# Altium PCB PCB2.PcbDoc (part 3 of 3)
Units mil, origin at the board's own origin, x right, y up, seen from the top; angles counter-clockwise.
Board outline 2598.43 x 2874.02 mil, 2 copper layers (Top Layer, Bottom Layer); 202 components, 116 nets, 598 pads, 319 vias.
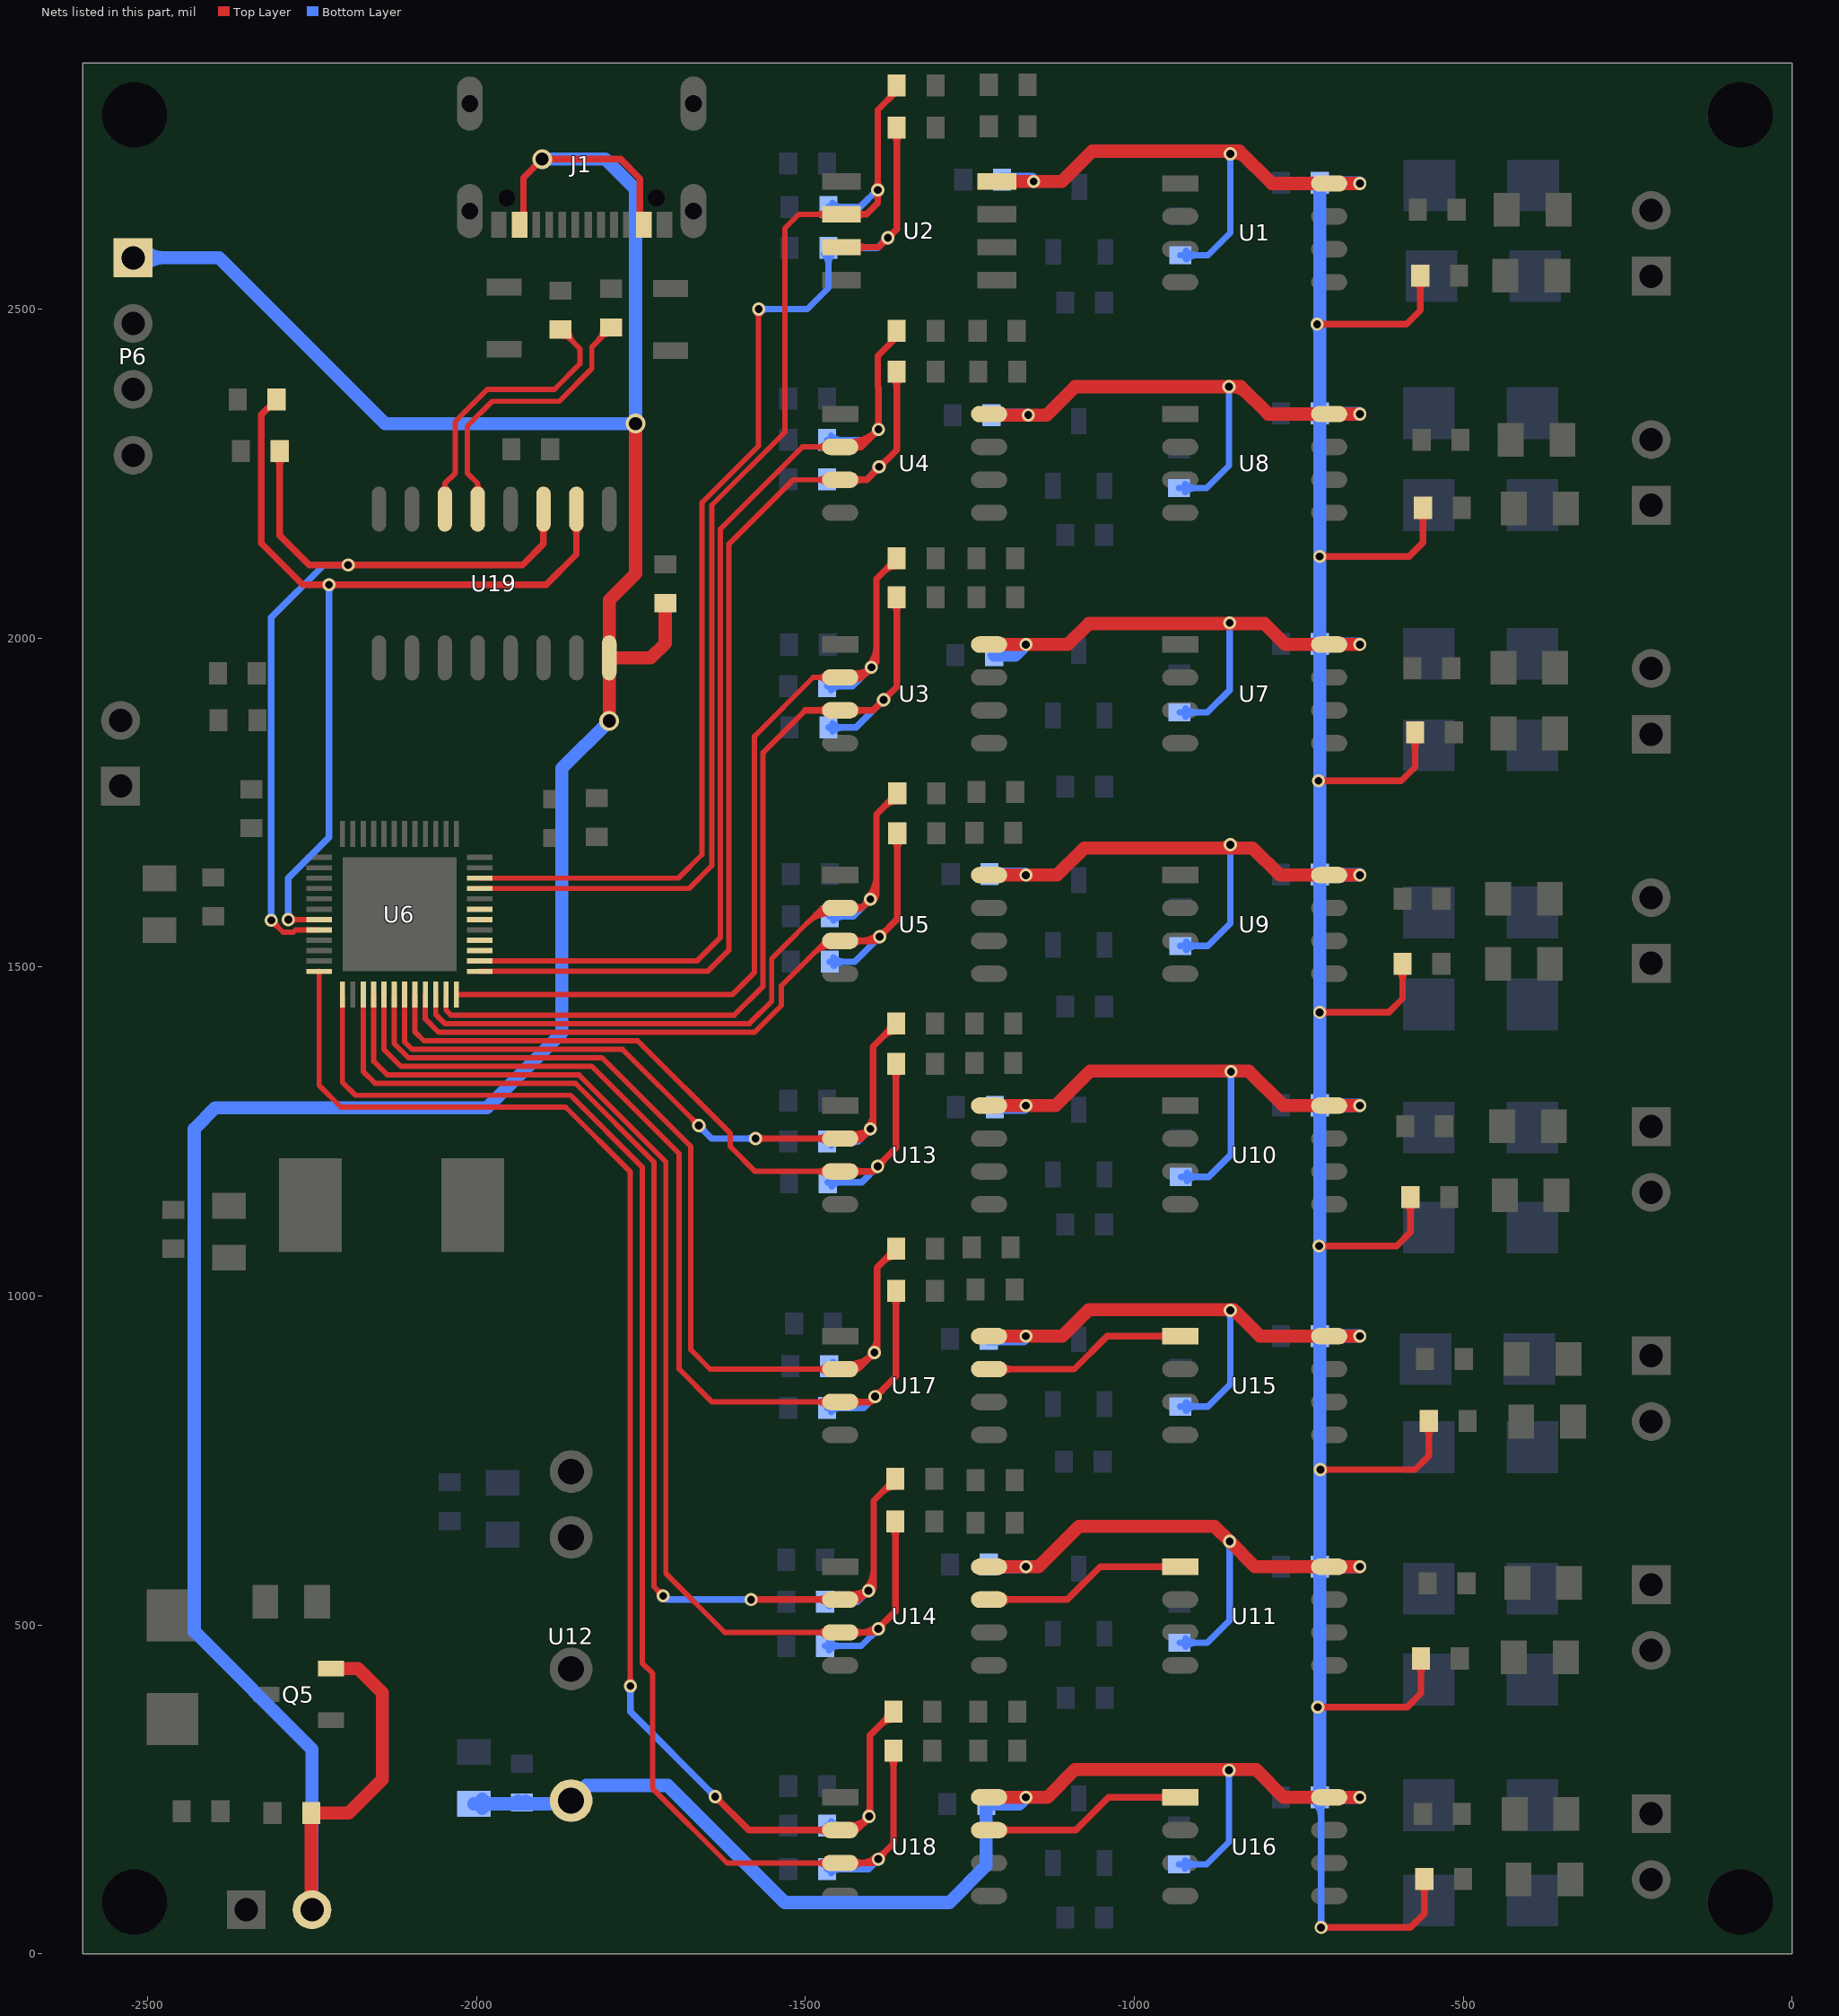
[diagram p3: the nets of this part, all layers, seen from the top]

## Via types
v1: diameter 20, hole 12, Top Layer to Bottom Layer, tented both sides, 315 vias
v2: diameter 30, hole 20, Top Layer to Bottom Layer, tented both sides, 4 vias

## Nets (pads, with @x,y where several pads share a name; then routed paths per layer and width w, separated by ;. In a path a pad name is that pad's centre, name@x,y a point inside that pad or via, vN(x,y) a via of type N, cw(c..) or ccw(c..) an arc to the next point about the centre after c; other vN are vias at no path point) (continued)
NetU11_1: U11.1 U14.7 | length 368.2
  Top Layer w10: U14.7@-1220.62,538.43 -1101.57,538.43 -1051.57,588.43 U11.1@-930,588.43 ; U14.7@-1200.32,533.13 cw(c-1187.52,520.32) -1187.52,538.43 cw(c-1187.52,556.54) U14.7@-1200.32,543.73 ; U11.1@-950.3,583.13 ccw(c-963.11,570.32) -963.11,588.43 ccw(c-963.11,606.54) U11.1@-950.3,593.73
NetU15_1: U15.1 U17.7 | length 368.2
  Top Layer w10: U17.7@-1220.62,888.86 -1091.14,888.86 -1041.14,938.86 U15.1@-930,938.86 ; U17.7@-1200.32,883.55 cw(c-1187.52,870.75) -1187.52,888.86 cw(c-1187.52,906.96) U17.7@-1200.32,894.16 ; U15.1@-950.3,933.55 ccw(c-963.11,920.75) -963.11,938.86 ccw(c-963.11,956.96) U15.1@-950.3,944.16
NetU16_1: U16.1 U18.7 | length 368.2
  Top Layer w10: U18.7@-1220.62,188 -1089,188 -1039,238 U16.1@-930,238 ; U18.7@-1200.32,182.7 cw(c-1187.52,169.89) -1187.52,188 cw(c-1187.52,206.11) U18.7@-1200.32,193.3 ; U16.1@-950.3,232.7 ccw(c-963.11,219.89) -963.11,238 ccw(c-963.11,256.11) U16.1@-950.3,243.3
RXD0: R35.1 U6.19 U19.2 | length 1524
  Top Layer w8: v1@-2285.86,1572.14 U6.19@-2239.05,1572.14 ; v1@-2281.76,1567.76 cw(c-2271.16,1557.16) -2271.16,1572.14 ; v1@-2281.76,1576.24 ccw(c-2271.86,1586.14) -2271.86,1572.14
  Top Layer w10: R35.1@-2304,2362.35 -2327,2339.35 -2327,2144 -2264,2081 v1(-2224,2081) -1894,2081 -1848,2127 U19.2@-1848,2196.09 ; v1@-2227.54,2077.46 ccw(c-2236.07,2068.93) -2236.07,2081 ccw(c-2236.07,2093.07) v1@-2227.54,2084.54 ; v1@-2220.46,2077.46 cw(c-2211.93,2068.93) -2211.93,2081 cw(c-2211.93,2093.07) v1@-2220.46,2084.54 ; U19.2@-1852.26,2168.5 cw(c-1862.54,2158.22) -1848,2158.22 cw(c-1833.46,2158.22) U19.2@-1843.74,2168.5
  Bottom Layer w10: v1@-2289.54,1575.54 ccw(c-2298.07,1584.07) -2286,1584.07 ccw(c-2273.93,1584.07) v1@-2282.46,1575.54 ; v1(-2286,1572) -2286,1635 -2224,1697 v1(-2224,2081) ; v1@-2227.54,2077.46 cw(c-2236.07,2068.93) -2224,2068.93 cw(c-2211.93,2068.93) v1@-2220.46,2077.46
RXD1: LED9.2 R2.2 U2.2 U6.45 | length 1967.2
  Top Layer w8: U6.45@-1994.95,1619.38 -1676.62,1619.38 -1642,1654 -1642,2202 -1531,2313 -1531,2623 -1509.83,2644.17 U2.2@-1444.97,2644.17 ; U2.2@-1468.01,2638.16 ccw(c-1482.52,2623.64) -1482.52,2644.17 ccw(c-1482.52,2664.69) U2.2@-1468.01,2650.18
  Top Layer w10: U2.2@-1444.97,2644.17 -1406.83,2644.17 -1389.83,2661.17 v1(-1389.83,2681) -1389.83,2802.78 -1361.06,2831.56 LED9.2@-1361.06,2840 ; U2.2@-1422.64,2638.86 cw(c-1409.84,2626.06) -1409.84,2644.17 cw(c-1409.84,2662.27) U2.2@-1422.64,2649.47 ; v1@-1393.37,2677.46 cw(c-1401.91,2668.93) -1389.83,2668.93 cw(c-1377.76,2668.93) v1@-1386.3,2677.46 ; v1@-1393.37,2684.54 ccw(c-1401.91,2693.07) -1389.83,2693.07 ccw(c-1377.76,2693.07) v1@-1386.3,2684.54
  Bottom Layer w10: R2.2@-1464.94,2655 -1416.83,2655 v1@-1389.83,2682 ; R2.2@-1458.74,2648.79 cw(c-1443.75,2633.8) -1443.75,2655 cw(c-1443.75,2676.2) R2.2@-1458.74,2661.21 ; -1400.08,2671.76 cw(c-1389.83,2661.51) v1@-1389.83,2676 ; -1397.66,2674.17 ccw(c-1404.49,2681) v1@-1394.83,2681
RXD2: LED1.2 R10.2 U4.2 U6.38 | length 1770.9
  Top Layer w8: U6.38@-1994.95,1509.14 -1664.85,1509.14 -1629,1545 -1629,2166 -1504.43,2290.57 U4.2@-1447,2290.57 ; U4.2@-1468.01,2284.56 ccw(c-1482.52,2270.05) -1482.52,2290.57 ccw(c-1482.52,2311.09) U4.2@-1468.01,2296.58
  Top Layer w10: U4.2@-1447,2290.57 -1415.43,2290.57 ; U4.2@-1432,2288.07 ccw(c-1432,2322.04) -1407.98,2298.02 ; U4.2@-1432,2298.07 ccw(c-1432,2356.18) v1@-1390.91,2315.09 ; U4.2@-1426.37,2285.62 cw(c-1415.43,2276.02) -1415.43,2290.57 ; U4.2@-1426.37,2295.52 ccw(c-1415.43,2305.13) -1415.43,2290.57 ; v1@-1393.89,2317.11 cw(c-1405.96,2317.11) -1397.43,2308.57 cw(c-1388.89,2300.04) v1@-1388.89,2312.11 ; v1@-1392.43,2320.65 ccw(c-1400.96,2329.18) -1388.89,2329.18 ccw(c-1376.82,2329.18) v1@-1385.35,2320.65 ; LED1.2@-1361.06,2467 -1361.06,2457.67 -1389.83,2428.89 -1389.83,2382.05 -1388.89,2381.11 v1(-1388.89,2317.11) -1415.43,2290.57
  Bottom Layer w10: R10.2@-1466.94,2301 -1405,2301 v1(-1388.89,2317.11) ; R10.2@-1460.74,2294.79 cw(c-1445.75,2279.8) -1445.75,2301 cw(c-1445.75,2322.2) R10.2@-1460.74,2307.21 ; v1@-1393.89,2317.11 cw(c-1405.96,2317.11) -1397.43,2308.57 cw(c-1388.89,2300.04) v1@-1388.89,2312.11
RXD3: LED3.2 R3.2 U3.2 U6.36 | length 1553.5
  Top Layer w8: U6.36@-2030.39,1457.95 -1611.05,1457.95 -1577.18,1491.82 -1577.18,1850.97 -1488,1940.14 U3.2@-1447,1940.14 ; U3.2@-1468.01,1934.13 ccw(c-1482.52,1919.62) -1482.52,1940.14 ccw(c-1482.52,1960.66) U3.2@-1468.01,1946.15
  Top Layer w10: U3.2@-1447,1940.14 -1414.86,1940.14 ; U3.2@-1432.66,1937.73 ccw(c-1426.96,1958.51) -1411.73,1943.27 ; U3.2@-1430.02,1947.38 ccw(c-1421.72,1977.59) v1(-1399.56,1955.44) ; U3.2@-1426.49,1935.05 cw(c-1414.86,1924.3) -1414.86,1940.14 ; U3.2@-1426.49,1945.23 ccw(c-1414.86,1955.98) -1414.86,1940.14 ; v1@-1404.56,1955.44 cw(c-1416.63,1955.44) -1408.1,1946.9 cw(c-1399.56,1938.37) v1@-1399.56,1950.44 ; v1@-1403.1,1958.97 ccw(c-1429.89,1985.77) -1392,1985.77 ; -1381.08,2100.97 cw(c-1361.06,2080.94) LED3.2@-1361.06,2109.27 ; LED3.2@-1373.95,2108.1 ccw(c-1383.9,2118.05) LED3.2@-1369.83,2118.05 ; LED3.2@-1361.06,2121 -1392,2090.06 -1392,1963 v1(-1399.56,1955.44) ; -1414.86,1940.14 v1(-1399.56,1955.44)
  Bottom Layer w10: R3.2@-1466.94,1927 -1428,1927 v1@-1401.52,1953.48 ; R3.2@-1460.74,1920.79 cw(c-1445.75,1905.8) -1445.75,1927 cw(c-1445.75,1948.2) R3.2@-1460.74,1933.21 ; v1@-1404.56,1955.44 cw(c-1416.63,1955.44) -1408.1,1946.9 cw(c-1399.56,1938.37) v1@-1399.56,1950.44
RXD4: LED6.2 R11.2 U5.2 U6.34 | length 1307.7
  Top Layer w8: U6.34@-2061.89,1457.95 -2061.89,1427.89 -2048,1414 -1585,1414 -1551.18,1447.82 -1551.18,1512.82 -1474.29,1589.71 U5.2@-1447,1589.71 ; -1497.48,1566.52 cw(c-1462,1531.03) U5.2@-1462,1581.21 ; -1483.83,1580.17 cw(c-1462,1558.35) U5.2@-1462,1589.21
  Top Layer w10: U5.2@-1447,1589.71 -1414.29,1589.71 ; U5.2@-1426.61,1584.49 cw(c-1414.29,1572.55) -1414.29,1589.71 ; U5.2@-1426.61,1594.93 ccw(c-1414.29,1606.88) -1414.29,1589.71 ; v1@-1406,1603 cw(c-1418.07,1603) -1409.54,1594.46 cw(c-1401,1585.93) v1@-1401,1598 ; v1@-1404.54,1606.54 ccw(c-1434.8,1636.8) -1392,1636.8 ; v1@-1397.46,1599.46 ccw(c-1410.66,1612.66) -1392,1612.66 ; -1380.08,1743.97 cw(c-1360.06,1723.94) LED6.2@-1360.06,1752.27 ; LED6.2@-1372.95,1751.1 ccw(c-1382.9,1761.05) LED6.2@-1368.83,1761.05 ; LED6.2@-1360.06,1764 -1392,1732.06 -1392,1612 v1(-1401,1603) -1414.29,1589.71
  Bottom Layer w10: R11.2@-1463,1577 -1427,1577 v1(-1401,1603) ; R11.2@-1456.79,1570.79 cw(c-1441.8,1555.8) -1441.8,1577 cw(c-1441.8,1598.2) R11.2@-1456.79,1583.21 ; v1@-1406,1603 cw(c-1418.07,1603) -1409.54,1594.46 cw(c-1401,1585.93) v1@-1401,1598
RXD5: LED11.2 R39.2 U6.31 U13.2 | length 1436.5
  Top Layer w8: U6.31@-2109.12,1457.95 -2109.12,1386.28 -2097.85,1375 -1778,1375 v1(-1662,1259) ; v1@-1668,1259 ccw(c-1682.49,1259) -1672.24,1269.24 ccw(c-1662,1279.49) v1@-1662,1265
  Top Layer w10: v1(-1575.71,1239.29) -1505,1239.29 ; v1@-1572.18,1235.75 cw(c-1563.64,1227.21) -1563.64,1239.29 cw(c-1563.64,1251.36) v1@-1572.18,1242.82 ; -1524.29,1239.29 -1505,1239.29 ; U13.2@-1467.3,1233.98 ccw(c-1480.11,1221.18) -1480.11,1239.29 ccw(c-1480.11,1257.39) U13.2@-1467.3,1244.59 ; U13.2@-1432.47,1236.83 ccw(c-1427.85,1261.12) -1410.36,1243.64 ; U13.2@-1430.6,1246.65 ccw(c-1423.58,1283.57) v1@-1397,1257 ; U13.2@-1426.52,1234.16 cw(c-1414.72,1223.12) -1414.72,1239.29 ; U13.2@-1426.52,1244.41 ccw(c-1414.72,1255.45) -1414.72,1239.29 ; -1410.24,1243.76 ccw(c-1420.49,1254) v1@-1406,1254 ; -1407.83,1246.17 cw(c-1401,1239.34) v1@-1401,1249 ; v1@-1404.54,1257.54 ccw(c-1422.73,1275.73) -1397,1275.73 ; -1382.08,1393.97 cw(c-1362.06,1373.94) LED11.2@-1362.06,1402.27 ; LED11.2@-1374.95,1401.1 ccw(c-1384.9,1411.05) LED11.2@-1370.83,1411.05 ; LED11.2@-1362.06,1414 -1397,1379.06 v1@-1397,1257 ; -1505,1239.29 U13.2@-1447,1239.29 -1414.71,1239.29 ; -1414.71,1239.29 v1@-1397,1257
  Bottom Layer w10: v1@-1662,1254 cw(c-1662,1241.93) -1653.46,1250.46 cw(c-1644.93,1259) v1@-1657,1259 ; v1(-1662,1259) -1642.29,1239.29 v1(-1575.71,1239.29) ; v1@-1579.25,1235.75 ccw(c-1587.79,1227.21) -1587.79,1239.29 ccw(c-1587.79,1251.36) v1@-1579.25,1242.82 ; R39.2@-1466.94,1235 -1420,1235 v1(-1401,1254) ; R39.2@-1460.74,1228.79 cw(c-1445.75,1213.8) -1445.75,1235 cw(c-1445.75,1256.2) R39.2@-1460.74,1241.21 ; v1@-1406,1254 cw(c-1418.07,1254) -1409.54,1245.46 cw(c-1401,1236.93) v1@-1401,1249
RXD6: LED13.2 R47.2 U6.30 U17.2 | length 1661.7
  Top Layer w8: U6.30@-2124.88,1457.95 -2124.88,1383.64 -2103.23,1362 -1809,1362 -1674,1227 -1674,918 -1644.86,888.86 U17.2@-1447,888.86 ; U17.2@-1468.01,882.85 ccw(c-1482.52,868.34) -1482.52,888.86 ccw(c-1482.52,909.38) U17.2@-1468.01,894.87
  Top Layer w10: U17.2@-1447,888.86 -1420.14,888.86 -1390.83,918.17 -1390.83,1043.22 LED13.2@-1362.06,1072 ; U17.2@-1432,886.36 ccw(c-1432,908.95) -1416.03,892.97 ; U17.2@-1432,896.36 ccw(c-1432,943.09) v1@-1398.96,910.04 ; v1@-1400,914 cw(c-1412.07,914) -1403.54,905.46 cw(c-1395,896.93) v1@-1395,909 ; v1@-1398.54,917.54 ccw(c-1417.13,936.13) -1390.83,936.13 ; -1382.08,1051.97 cw(c-1362.06,1031.94) LED13.2@-1362.06,1060.27 ; LED13.2@-1374.95,1059.1 ccw(c-1384.9,1069.05) LED13.2@-1370.83,1069.05
  Bottom Layer w10: R47.2@-1463.94,893 -1416,893 v1(-1395,914) ; R47.2@-1457.74,886.79 cw(c-1442.75,871.8) -1442.75,893 cw(c-1442.75,914.2) R47.2@-1457.74,899.21 ; v1@-1400,914 cw(c-1412.07,914) -1403.54,905.46 cw(c-1395,896.93) v1@-1395,909
RXD7: LED15.2 R40.2 U6.27 U14.2 | length 2166.4
  Top Layer w8: U6.27@-2172.11,1457.95 -2172.11,1341.11 -2154,1323 -1849.54,1323 -1730,1203.46 -1730,558 v1(-1716,544) ; v1@-1722,544 ccw(c-1736.49,544) -1726.24,554.24 ccw(c-1716,564.49) v1@-1716,550
  Top Layer w10: v1(-1582.43,538.43) U14.2@-1447,538.43 -1418.57,538.43 ; v1@-1578.89,534.89 cw(c-1570.36,526.36) -1570.36,538.43 cw(c-1570.36,550.5) v1@-1578.89,541.96 ; U14.2@-1467.3,533.13 ccw(c-1480.11,520.32) -1480.11,538.43 ccw(c-1480.11,556.54) U14.2@-1467.3,543.73 ; U14.2@-1432,535.93 ccw(c-1432,562.31) -1413.34,543.66 ; U14.2@-1432,545.93 ccw(c-1432,596.45) -1396.27,560.73 ; U14.2@-1425.61,534.5 cw(c-1418.57,530.16) -1418.57,538.43 ; U14.2@-1425.61,542.36 ccw(c-1418.57,546.7) -1418.57,538.43 ; -1414.24,542.76 cw(c-1404,532.51) v1@-1404,547 ; -1411.83,545.17 ccw(c-1418.66,552) v1@-1409,552 ; v1@-1407.54,555.54 ccw(c-1435.38,583.38) -1396,583.38 ; v1@-1400.46,548.46 ccw(c-1411.24,559.24) -1396,559.24 ; -1383.08,701.97 cw(c-1363.06,681.94) LED15.2@-1363.06,710.27 ; LED15.2@-1375.95,709.1 ccw(c-1385.9,719.05) LED15.2@-1371.83,719.05 ; LED15.2@-1363.06,722 -1396,689.06 -1396,561 -1418.57,538.43
  Bottom Layer w10: v1@-1710.43,538.43 v1(-1582.43,538.43) ; v1@-1585.96,534.89 ccw(c-1594.5,526.36) -1594.5,538.43 ccw(c-1594.5,550.5) v1@-1585.96,541.96 ; R40.2@-1469.94,535 -1421,535 v1(-1404,552) ; R40.2@-1463.74,528.79 cw(c-1448.75,513.8) -1448.75,535 cw(c-1448.75,556.2) R40.2@-1463.74,541.21 ; v1@-1409,552 cw(c-1421.07,552) -1412.54,543.46 cw(c-1404,534.93) v1@-1404,547
RXD8: LED17.2 R48.2 U6.24 U18.2 | length 2479.4
  Top Layer w8: U6.24@-2239.05,1493.39 -2239.05,1320.05 -2206,1287 -1864.46,1287 -1766,1188.54 v1(-1766,407) ; v1@-1770.24,411.24 ccw(c-1780.49,421.49) -1766,421.49 ccw(c-1751.51,421.49) v1@-1761.76,411.24
  Top Layer w10: v1@-1637,234 cw(c-1637,221.93) -1628.46,230.46 cw(c-1619.93,239) v1@-1632,239 ; v1(-1637,239) -1586,188 U18.2@-1447,188 -1422,188 -1402,208 -1402,332.06 LED17.2@-1366.06,368 ; U18.2@-1467.3,182.7 ccw(c-1480.11,169.89) -1480.11,188 ccw(c-1480.11,206.11) U18.2@-1467.3,193.3 ; U18.2@-1432,185.5 ccw(c-1432,203.61) -1419.2,190.8 ; U18.2@-1432,195.5 ccw(c-1432,237.75) v1@-1402.13,207.87 ; -1412.95,197.05 ccw(c-1424.9,209) v1@-1408,209 ; v1@-1406.54,212.54 ccw(c-1417.49,223.49) -1402,223.49 ; -1386.08,347.97 cw(c-1366.06,327.94) LED17.2@-1366.06,356.27 ; LED17.2@-1378.95,355.1 ccw(c-1388.9,365.05) LED17.2@-1374.83,365.05
  Bottom Layer w10: v1@-1769.54,403.46 cw(c-1778.07,394.93) -1766,394.93 cw(c-1753.93,394.93) v1@-1762.46,403.46 ; v1(-1766,407) -1766,368 v1(-1637,239) ; v1@-1642,239 ccw(c-1654.07,239) -1645.54,247.54 ccw(c-1637,256.07) v1@-1637,244 ; R48.2@-1466.94,195 -1417,195 v1(-1403,209) ; R48.2@-1460.74,188.79 cw(c-1445.75,173.8) -1445.75,195 cw(c-1445.75,216.2) R48.2@-1460.74,201.21 ; v1@-1408,209 cw(c-1420.07,209) -1411.54,200.46 cw(c-1403,191.93) v1@-1403,204
TXD0: R36.1 U6.20 U19.3 | length 1460.8
  Top Layer w8: v1@-2311.87,1565 cw(c-2311.87,1550.51) -2301.63,1560.76 cw(c-2291.38,1571) v1@-2305.87,1571 ; v1(-2311.87,1571) -2293.87,1553 -2278.13,1553 -2274.74,1556.39 -2259,1556.39 U6.20@-2239.05,1556.39
  Top Layer w10: R36.1@-2305.21,2275.19 cw(c-2320.2,2260.2) -2299,2260.2 cw(c-2277.8,2260.2) R36.1@-2292.79,2275.19 ; R36.1@-2299,2284.35 -2299,2156 -2254,2111 v1(-2195,2111) -1930,2111 -1898,2143 U19.3@-1898,2196.09 ; v1@-2198.54,2107.46 ccw(c-2207.07,2098.93) -2207.07,2111 ccw(c-2207.07,2123.07) v1@-2198.54,2114.54 ; v1@-2191.46,2107.46 cw(c-2182.93,2098.93) -2182.93,2111 cw(c-2182.93,2123.07) v1@-2191.46,2114.54 ; U19.3@-1902.26,2168.5 cw(c-1912.54,2158.22) -1898,2158.22 cw(c-1883.46,2158.22) U19.3@-1893.74,2168.5
  Bottom Layer w10: v1@-2315.41,1574.54 ccw(c-2323.94,1583.07) -2311.87,1583.07 ccw(c-2299.8,1583.07) v1@-2308.33,1574.54 ; v1(-2311.87,1571) -2311.87,2031.13 -2232,2111 v1(-2195,2111) ; v1@-2198.54,2107.46 ccw(c-2207.07,2098.93) -2207.07,2111 ccw(c-2207.07,2123.07) v1@-2198.54,2114.54
TXD1: LED5.2 R4.2 U2.3 U6.46 | length 1972
  Top Layer w8: U6.46@-1994.95,1635.12 -1692.88,1635.12 -1657,1671 -1657,2206 -1571,2292 v1(-1571,2500) ; v1@-1575.24,2495.76 cw(c-1585.49,2485.51) -1571,2485.51 cw(c-1556.51,2485.51) v1@-1566.76,2495.76
  Top Layer w10: U2.3@-1444.97,2594.17 -1388.83,2594.17 v1(-1374.51,2608.49) -1361.06,2621.94 LED5.2@-1361.06,2776 ; U2.3@-1422.64,2588.86 cw(c-1409.84,2576.06) -1409.84,2594.17 cw(c-1409.84,2612.27) U2.3@-1422.64,2599.47 ; v1@-1379.51,2608.49 cw(c-1391.58,2608.49) -1383.04,2599.96 cw(c-1374.51,2591.42) v1@-1374.51,2603.49 ; v1@-1374.51,2613.49 ccw(c-1374.51,2625.56) -1365.97,2617.03 ccw(c-1357.44,2608.49) v1@-1369.51,2608.49 ; LED5.2@-1367.26,2766.84 cw(c-1382.25,2751.85) -1361.06,2751.85 cw(c-1339.86,2751.85) LED5.2@-1354.85,2766.84
  Bottom Layer w10: v1(-1571,2500) -1497,2500 -1464.94,2532.06 R4.2@-1464.94,2593 -1390,2593 v1(-1374.51,2608.49) v1@-1373.77,2609.23 ; v1@-1567.46,2496.46 cw(c-1558.93,2487.93) -1558.93,2500 cw(c-1558.93,2512.07) v1@-1567.46,2503.54 ; R4.2@-1471.15,2583.84 cw(c-1486.14,2568.85) -1464.94,2568.85 cw(c-1443.75,2568.85) R4.2@-1458.74,2583.84 ; R4.2@-1458.74,2586.79 cw(c-1443.75,2571.8) -1443.75,2593 cw(c-1443.75,2614.2) R4.2@-1458.74,2599.21 ; v1@-1379.51,2608.49 cw(c-1391.58,2608.49) -1383.04,2599.96 cw(c-1374.51,2591.42) v1@-1374.51,2603.49
TXD2: LED2.2 R12.2 U4.3 U6.37 | length 1714
  Top Layer w8: U6.37@-1994.95,1493.39 -1648.6,1493.39 -1616,1526 -1616,2143 -1518.43,2240.57 U4.3@-1447,2240.57 ; U4.3@-1468.01,2234.56 ccw(c-1482.52,2220.05) -1482.52,2240.57 ccw(c-1482.52,2261.09) U4.3@-1468.01,2246.58
  Top Layer w10: U4.3@-1447,2240.57 -1406.43,2240.57 -1361.06,2285.94 LED2.2@-1361.06,2405 ; U4.3@-1426.7,2235.27 cw(c-1413.89,2222.46) -1413.89,2240.57 cw(c-1413.89,2258.68) U4.3@-1426.7,2245.87 ; -1396.95,2250.05 ccw(c-1407.19,2260.29) v1@-1392.71,2260.29 ; -1394.53,2252.47 cw(c-1387.71,2245.64) v1@-1387.71,2255.29 ; v1@-1387.71,2265.29 ccw(c-1387.71,2279.78) -1377.46,2269.54 ; v1@-1382.71,2260.29 cw(c-1373.05,2260.29) -1379.88,2267.12 ; LED2.2@-1367.26,2395.84 cw(c-1382.25,2380.85) -1361.06,2380.85 cw(c-1339.86,2380.85) LED2.2@-1354.85,2395.84
  Bottom Layer w10: R12.2@-1466.94,2241 -1407,2241 v1(-1387.71,2260.29) ; R12.2@-1460.74,2234.79 cw(c-1445.75,2219.8) -1445.75,2241 cw(c-1445.75,2262.2) R12.2@-1460.74,2247.21 ; v1@-1392.71,2260.29 cw(c-1404.78,2260.29) -1396.24,2251.76 cw(c-1387.71,2243.22) v1@-1387.71,2255.29
TXD3: LED4.2 R5.2 U3.3 U6.35 | length 1544.3
  Top Layer w8: U6.35@-2046.14,1457.95 -2046.14,1434.14 -2039,1427 -1608,1427 -1564.18,1470.82 -1564.18,1825.97 -1500,1890.14
  Top Layer w10: -1500,1890.14 U3.3@-1447,1890.14 -1396.86,1890.14 v1(-1380.94,1906.06) -1361.06,1925.94 LED4.2@-1361.06,2062 ; U3.3@-1467.3,1884.84 ccw(c-1480.11,1872.04) -1480.11,1890.14 ccw(c-1480.11,1908.25) U3.3@-1467.3,1895.45 ; U3.3@-1426.7,1884.84 cw(c-1413.89,1872.04) -1413.89,1890.14 cw(c-1413.89,1908.25) U3.3@-1426.7,1895.45 ; v1@-1385.94,1906.06 cw(c-1398.01,1906.06) -1389.48,1897.52 cw(c-1380.94,1888.99) v1@-1380.94,1901.06 ; v1@-1380.94,1911.06 ccw(c-1380.94,1923.13) -1372.41,1914.59 ccw(c-1363.87,1906.06) v1@-1375.94,1906.06 ; LED4.2@-1367.26,2052.84 cw(c-1382.25,2037.85) -1361.06,2037.85 cw(c-1339.86,2037.85) LED4.2@-1354.85,2052.84
  Bottom Layer w10: R5.2@-1464.94,1864 -1423,1864 v1@-1381,1906 ; R5.2@-1458.74,1857.79 cw(c-1443.75,1842.8) -1443.75,1864 cw(c-1443.75,1885.2) R5.2@-1458.74,1870.21 ; v1@-1385.94,1906.06 cw(c-1398.01,1906.06) -1389.48,1897.52 cw(c-1380.94,1888.99) v1@-1380.94,1901.06
TXD4: LED7.2 R13.2 U5.3 U6.33 | length 1273.6
  Top Layer w8: U6.33@-2077.62,1457.95 -2077.62,1421 -2057.62,1401 -1577,1401 -1536.5,1441.5 -1536.5,1471.5 -1468.29,1539.71 U5.3@-1447,1539.71 ; -1487.24,1520.76 cw(c-1462,1495.52) U5.3@-1462,1531.21 ; -1473.58,1534.42 cw(c-1462,1522.83) U5.3@-1462,1539.21
  Top Layer w10: U5.3@-1447,1539.71 -1393.29,1539.71 v1(-1387,1546) -1360.06,1572.94 LED7.2@-1360.06,1703 ; U5.3@-1426.7,1534.41 cw(c-1413.89,1521.61) -1413.89,1539.71 cw(c-1413.89,1557.82) U5.3@-1426.7,1545.02 ; -1414.25,1539.71 ccw(c-1414.25,1573.25) v1@-1390.54,1549.54 ; v1@-1387,1551 ccw(c-1387,1563.07) -1378.46,1554.54 ccw(c-1369.93,1546) v1@-1382,1546 ; LED7.2@-1366.26,1693.84 cw(c-1381.25,1678.85) -1360.06,1678.85 cw(c-1338.86,1678.85) LED7.2@-1353.85,1693.84
  Bottom Layer w10: R13.2@-1463,1508 -1425,1508 v1(-1387,1546) ; R13.2@-1456.79,1501.79 cw(c-1441.8,1486.8) -1441.8,1508 cw(c-1441.8,1529.2) R13.2@-1456.79,1514.21 ; v1@-1392,1546 cw(c-1404.07,1546) -1395.54,1537.46 cw(c-1387,1528.93) v1@-1387,1541
TXD5: LED10.2 R41.2 U6.32 U13.3 | length 1281.4
  Top Layer w8: U6.32@-2093.38,1457.95 -2093.38,1401.38 -2080,1388 -1755,1388 -1614,1247 -1614,1227 -1576.29,1189.29 U13.3@-1447,1189.29 ; U13.3@-1468.01,1183.28 ccw(c-1482.52,1168.76) -1482.52,1189.29 ccw(c-1482.52,1209.81) U13.3@-1468.01,1195.3
  Top Layer w10: U13.3@-1447,1189.29 -1397.71,1189.29 v1(-1390,1197) -1362.06,1224.94 LED10.2@-1362.06,1353 ; U13.3@-1426.7,1183.98 cw(c-1413.89,1171.18) -1413.89,1189.29 cw(c-1413.89,1207.39) U13.3@-1426.7,1194.59 ; v1@-1390,1202 ccw(c-1390,1214.07) -1381.46,1205.54 ccw(c-1372.93,1197) v1@-1385,1197 ; LED10.2@-1368.26,1343.84 cw(c-1383.25,1328.85) -1362.06,1328.85 cw(c-1340.86,1328.85) LED10.2@-1355.85,1343.84
  Bottom Layer w10: R41.2@-1465.94,1173 -1414,1173 v1(-1390,1197) ; R41.2@-1459.74,1166.79 cw(c-1444.75,1151.8) -1444.75,1173 cw(c-1444.75,1194.2) R41.2@-1459.74,1179.21 ; v1@-1395,1197 cw(c-1407.07,1197) -1398.54,1188.46 cw(c-1390,1179.93) v1@-1390,1192
TXD6: LED12.2 R49.2 U6.29 U17.3 | length 1667
  Top Layer w8: U6.29@-2140.62,1457.95 -2140.62,1374.62 -2115,1349 -1824.63,1349 -1692,1216.37 -1692,889 -1641.86,838.86 U17.3@-1447,838.86 ; U17.3@-1468.01,832.85 ccw(c-1482.52,818.34) -1482.52,838.86 ccw(c-1482.52,859.38) U17.3@-1468.01,844.87
  Top Layer w10: U17.3@-1447,838.86 -1401.14,838.86 -1362.06,877.94 LED12.2@-1362.06,1008 ; U17.3@-1426.7,833.55 cw(c-1413.89,820.75) -1413.89,838.86 cw(c-1413.89,856.96) U17.3@-1426.7,844.16 ; v1@-1394,852 ccw(c-1394,866.49) -1383.76,856.24 ; v1@-1389,847 cw(c-1379.34,847) -1386.17,853.83 ; LED12.2@-1368.26,998.84 cw(c-1383.25,983.85) -1362.06,983.85 cw(c-1340.86,983.85) LED12.2@-1355.85,998.84
  Bottom Layer w10: R49.2@-1466.94,830 -1411,830 v1(-1394,847) ; R49.2@-1460.74,823.79 cw(c-1445.75,808.8) -1445.75,830 cw(c-1445.75,851.2) R49.2@-1460.74,836.21 ; v1@-1399,847 cw(c-1411.07,847) -1402.54,838.46 cw(c-1394,829.93) v1@-1394,842
TXD7: LED14.2 R42.2 U6.28 U14.3 | length 2051.6
  Top Layer w8: U6.28@-2156.36,1457.95 -2156.36,1356.75 -2135.62,1336 -1844.16,1336 -1712,1203.84 -1712,578 -1622.43,488.43 U14.3@-1447,488.43 ; U14.3@-1468.01,482.42 ccw(c-1482.52,467.91) -1482.52,488.43 ccw(c-1482.52,508.95) U14.3@-1468.01,494.44
  Top Layer w10: U14.3@-1447,488.43 -1395.57,488.43 -1363.06,520.94 LED14.2@-1363.06,657 ; U14.3@-1426.7,483.13 cw(c-1413.89,470.32) -1413.89,488.43 cw(c-1413.89,506.54) U14.3@-1426.7,493.73 ; -1414.52,488.43 ccw(c-1414.52,519.52) v1@-1392.54,497.54 ; v1@-1389,499 ccw(c-1389,508.66) -1382.17,501.83 ; v1@-1384,494 cw(c-1369.51,494) -1379.76,504.24 ; LED14.2@-1369.26,647.84 cw(c-1384.25,632.85) -1363.06,632.85 cw(c-1341.86,632.85) LED14.2@-1356.85,647.84
  Bottom Layer w10: R42.2@-1469.94,468 -1415,468 v1(-1389,494) ; R42.2@-1463.74,461.79 cw(c-1448.75,446.8) -1448.75,468 cw(c-1448.75,489.2) R42.2@-1463.74,474.21 ; v1@-1394,494 cw(c-1406.07,494) -1397.54,485.46 cw(c-1389,476.93) v1@-1389,489
TXD8: LED16.2 R50.2 U6.25 U18.3 | length 2435
  Top Layer w8: U6.25@-2203.61,1457.95 -2203.61,1324.61 -2184,1305 -1857,1305 -1748,1196 -1748,442 -1732,426 -1732,251 -1619,138 U18.3@-1447,138 ; U18.3@-1468.01,131.99 ccw(c-1482.52,117.48) -1482.52,138 ccw(c-1482.52,158.52) U18.3@-1468.01,144.01
  Top Layer w10: U18.3@-1447,138 -1396,138 -1366.06,167.94 LED16.2@-1366.06,309 ; U18.3@-1426.7,132.7 cw(c-1413.89,119.89) -1413.89,138 cw(c-1413.89,156.11) U18.3@-1426.7,143.3 ; -1415.56,138 ccw(c-1415.56,170.56) v1@-1392.54,147.54 ; v1@-1389,149 ccw(c-1389,158.66) -1382.17,151.83 ; v1@-1384,144 cw(c-1369.51,144) -1379.76,154.24 ; LED16.2@-1372.26,299.84 cw(c-1387.25,284.85) -1366.06,284.85 cw(c-1344.86,284.85) LED16.2@-1359.85,299.84
  Bottom Layer w10: R50.2@-1466.94,129 -1404,129 v1(-1389,144) ; R50.2@-1460.74,122.79 cw(c-1445.75,107.8) -1445.75,129 cw(c-1445.75,150.2) R50.2@-1460.74,135.21 ; v1@-1394,144 cw(c-1406.07,144) -1397.54,135.46 cw(c-1389,126.93) v1@-1389,139
TXD_ISO: U6.39
TXD_ISO2: U6.40
TXD_ISO3: U6.42
TXD_ISO4: U6.43
USB_N: R33.1 U19.6 | length 497.4
  Top Layer w8: U19.6@-2052.65,2224.68 ccw(c-2061.77,2235) -2048,2235 ; U19.6@-2048,2196.09 -2048,2235 ; U19.6@-2043.35,2224.68 cw(c-2034.23,2235) -2048,2235 ; -2032,2289 -2032,2282 ; R33.1@-1872,2469 -1842.5,2439.5 -1842.5,2417 -1881.5,2378 -1983.46,2378 -2032,2329.46 -2032,2282 ; R33.1@-1869.05,2459.22 cw(c-1869.05,2442.74) -1857.39,2454.39 ; R33.1@-1859.27,2469 ccw(c-1828.53,2469) -1850.26,2447.26 ; -2048,2235 -2032,2251 -2032,2282
USB_P: R34.1 U19.5 | length 493.4
  Top Layer w8: U19.5@-2002.65,2224.68 ccw(c-2011.77,2235) -1998,2235 ; U19.5@-1998,2196.09 -1998,2235 ; U19.5@-1993.35,2224.68 cw(c-1984.23,2235) -1998,2235 ; -1816.74,2450.26 ccw(c-1838.47,2472) R34.1@-1807.73,2472 ; -1809.61,2457.39 cw(c-1797.95,2445.74) R34.1@-1797.95,2462.22 ; R34.1@-1795,2472 -1824.5,2442.5 -1824.5,2409.54 -1874.04,2360 -1976,2360 -2014,2322 -2014,2251 -1998,2235
VCC_5V_485: C1.2 C3.2 C5.2 C6.2 C7.2 C9.2 C10.2 C14.1 C18.2 C19.2 C21.2 C23.2 C24.2 C25.2 C27.2 C28.2 C32.2 C68.1 R6.2 R7.2 R14.2 R15.2 R44.2 R51.2 R52.2 R62.2 R63.2 R66.2 R67.2 R68.2 R71.2 R72.2 R75.2 R76.2 U1.8 U2.8 U3.8 U4.8 U5.8 U7.8 U8.8 U9.8 U10.8 U11.8 U12.6 U13.8 U14.8 U15.8 U16.8 U17.8 U18.8 | length 13790.5
  Top Layer w10: v1(-722,2477) -586,2477 -565.06,2497.94 R6.2@-565.06,2551 ; v1(-721,375) -585,375 -564.06,395.94 R44.2@-564.06,449 ; v1(-720,1783) -594,1783 -573.06,1803.94 R7.2@-573.06,1857 ; v1(-719,1076) -601,1076 -580.06,1096.94 R68.2@-580.06,1150 ; v1@-718.46,2473.46 cw(c-709.93,2464.93) -709.93,2477 cw(c-709.93,2489.07) v1@-718.46,2480.54 ; v1(-718,1431) -613,1431 -592.06,1451.94 R15.2@-592.06,1505 ; v1(-718,2124) -582,2124 -561.06,2144.94 R14.2@-561.06,2198 ; v1@-717.46,371.46 cw(c-708.93,362.93) -708.93,375 cw(c-708.93,387.07) v1@-717.46,378.54 ; v1(-717,736) -573,736 -552.06,756.94 R51.2@-552.06,810 ; v1@-716.46,1779.46 cw(c-707.93,1770.93) -707.93,1783 cw(c-707.93,1795.07) v1@-716.46,1786.54 ; v1(-716,40) -580,40 -559.06,60.94 R52.2@-559.06,114 ; v1@-715.46,1072.46 cw(c-706.93,1063.93) -706.93,1076 cw(c-706.93,1088.07) v1@-715.46,1079.54 ; v1@-714.46,1427.46 cw(c-705.93,1418.93) -705.93,1431 cw(c-705.93,1443.07) v1@-714.46,1434.54 ; v1@-714.46,2120.46 cw(c-705.93,2111.93) -705.93,2124 cw(c-705.93,2136.07) v1@-714.46,2127.54 ; v1@-713.46,732.46 cw(c-704.93,723.93) -704.93,736 cw(c-704.93,748.07) v1@-713.46,739.54 ; v1@-712.46,36.46 cw(c-703.93,27.93) -703.93,40 cw(c-703.93,52.07) v1@-712.46,43.54 ; R15.2@-598.26,1495.84 cw(c-613.25,1480.85) -592.06,1480.85 cw(c-570.86,1480.85) R15.2@-585.85,1495.84 ; R68.2@-586.26,1140.84 cw(c-601.25,1125.85) -580.06,1125.85 cw(c-558.86,1125.85) R68.2@-573.85,1140.84 ; R7.2@-579.26,1847.84 cw(c-594.25,1832.85) -573.06,1832.85 cw(c-551.86,1832.85) R7.2@-566.85,1847.84 ; R6.2@-571.26,2541.84 cw(c-586.25,2526.85) -565.06,2526.85 cw(c-543.86,2526.85) R6.2@-558.85,2541.84 ; R44.2@-570.26,439.84 cw(c-585.25,424.85) -564.06,424.85 cw(c-542.86,424.85) R44.2@-557.85,439.84 ; R14.2@-567.26,2188.84 cw(c-582.25,2173.85) -561.06,2173.85 cw(c-539.86,2173.85) R14.2@-554.85,2188.84 ; R52.2@-565.26,104.84 cw(c-580.25,89.85) -559.06,89.85 cw(c-537.86,89.85) R52.2@-552.85,104.84 ; R51.2@-558.26,800.84 cw(c-573.25,785.85) -552.06,785.85 cw(c-530.86,785.85) R51.2@-545.85,800.84
  Top Layer w20: U18.8@-1220.62,238 v1(-1164.7,238) -1132,238 -1090,280 -815,280 -773,238 U16.8@-703.62,238 v1(-657,238) ; U14.8@-1220.62,588.43 v1(-1164.7,588.43) -1145.57,588.43 -1084,650 -878,650 v1(-855,627) -816.43,588.43 U11.8@-703.62,588.43 v1(-657,588.43) ; U17.8@-1220.62,938.86 v1(-1164.7,938.86) -1109.14,938.86 -1069,979 -849,979 -808.86,938.86 U15.8@-703.62,938.86 v1(-657,938.86) ; U13.8@-1220.62,1289.29 v1(-1164.7,1289.29) -1119.71,1289.29 -1067,1342 -826,1342 -773.29,1289.29 U10.8@-703.62,1289.29 v1(-657,1289.29) ; U5.8@-1220.62,1639.71 v1(-1164.7,1639.71) -1117.29,1639.71 -1076,1681 -820,1681 -778.71,1639.71 U9.8@-703.62,1639.71 v1(-657,1639.71) ; U3.8@-1220.62,1990.14 v1(-1164.7,1990.14) -1100.86,1990.14 -1069,2022 -802,2022 -770.14,1990.14 U7.8@-703.62,1990.14 v1(-657,1990.14) ; U4.8@-1216.94,2339 v1(-1161.03,2339) -1133,2339 -1090,2382 v1(-856,2382) ; U2.8@-1208.75,2694.17 v1(-1152.83,2694.17) -1109.83,2694.17 -1064,2740 -840,2740 -791,2691 U1.8@-703.62,2691 v1(-657,2691) ; -866.07,1681 ccw(c-866.07,1698.07) v1(-854,1686) ccw(c-841.93,1698.07) -841.93,1681 ; -863.66,2740 cw(c-863.66,2726.34) v1(-854,2736) ; v1(-854,978) cw(c-854,963.51) -843.76,973.76 ; -844.34,2740 ccw(c-844.34,2726.34) v1(-854,2736) ; -831,2731 ccw(c-846.39,2715.61) v1(-854,2736) ; -829,2373 ccw(c-851.5,2350.5) v1(-856,2382) ; v1(-657,2340.57) U8.8@-703.62,2340.57 -796.57,2340.57 -838,2382 v1(-856,2382)
  Bottom Layer w10: R76.2@-932,135.94 -890.06,135.94 -856,170 v1(-856,279) ; R66.2@-932,2227.94 -890.06,2227.94 -856,2262 v1(-856,2382) ; R72.2@-931,472.94 -889.06,472.94 -855,507 v1(-855,627) ; R63.2@-931,1886.94 -889.06,1886.94 -855,1921 v1(-855,2023) ; R75.2@-930,831.94 -888.06,831.94 -854,866 v1(-854,978) ; R67.2@-930,1531.94 -888.06,1531.94 -854,1566 v1(-854,1686) ; R62.2@-930,2581.94 -888.06,2581.94 -854,2616 v1(-854,2736) ; R71.2@-929,1180.94 -887.06,1180.94 -853,1215 v1(-853,1341) ; R76.2@-922.84,129.74 cw(c-907.85,114.75) -907.85,135.94 cw(c-907.85,157.14) R76.2@-922.84,142.15 ; R66.2@-922.84,2221.74 cw(c-907.85,2206.75) -907.85,2227.94 cw(c-907.85,2249.14) R66.2@-922.84,2234.15 ; R72.2@-921.84,466.74 cw(c-906.85,451.75) -906.85,472.94 cw(c-906.85,494.14) R72.2@-921.84,479.15 ; R63.2@-921.84,1880.74 cw(c-906.85,1865.75) -906.85,1886.94 cw(c-906.85,1908.14) R63.2@-921.84,1893.15 ; R75.2@-920.84,825.74 cw(c-905.85,810.75) -905.85,831.94 cw(c-905.85,853.14) R75.2@-920.84,838.15 ; R67.2@-920.84,1525.74 cw(c-905.85,1510.75) -905.85,1531.94 cw(c-905.85,1553.14) R67.2@-920.84,1538.15 ; R62.2@-920.84,2575.74 cw(c-905.85,2560.75) -905.85,2581.94 cw(c-905.85,2603.14) R62.2@-920.84,2588.15 ; R71.2@-919.84,1174.74 cw(c-904.85,1159.75) -904.85,1180.94 cw(c-904.85,1202.14) R71.2@-919.84,1187.15 ; v1@-859.54,275.46 cw(c-868.07,266.93) -856,266.93 cw(c-843.93,266.93) v1@-852.46,275.46 ; v1@-859.54,2378.46 cw(c-868.07,2369.93) -856,2369.93 cw(c-843.93,2369.93) v1@-852.46,2378.46 ; v1@-858.54,623.46 cw(c-867.07,614.93) -855,614.93 cw(c-842.93,614.93) v1@-851.46,623.46 ; v1@-858.54,2019.46 cw(c-867.07,2010.93) -855,2010.93 cw(c-842.93,2010.93) v1@-851.46,2019.46 ; v1@-857.54,974.46 cw(c-866.07,965.93) -854,965.93 cw(c-841.93,965.93) v1@-850.46,974.46 ; v1@-857.54,1682.46 cw(c-866.07,1673.93) -854,1673.93 cw(c-841.93,1673.93) v1@-850.46,1682.46 ; v1@-857.54,2732.46 cw(c-866.07,2723.93) -854,2723.93 cw(c-841.93,2723.93) v1@-850.46,2732.46 ; v1@-856.54,1337.46 cw(c-865.07,1328.93) -853,1328.93 cw(c-840.93,1328.93) v1@-849.46,1337.46 ; C25.2@-724.15,228.84 cw(c-743.84,209.16) -716,209.16 ; v1@-719.54,43.54 ccw(c-728.07,52.07) -716,52.07 ccw(c-703.93,52.07) v1@-712.46,43.54 ; C25.2@-717.94,238 -716,236.06 v1(-716,40) ; -716,218.55 cw(c-701.44,218.55) C25.2@-711.74,228.84
  Bottom Layer w20: C14.1@-2004,228 -1860.99,228 U12.6@-1856,233 -1832.99,256 -1709,256 -1531,78 -1281,78 -1224.94,134.06 C28.2@-1224.94,228 -1174.7,228 v1(-1164.7,238) ; C14.1@-1991.25,221.15 cw(c-1974.71,204.62) -1974.71,228 cw(c-1974.71,251.38) C14.1@-1991.25,234.85 ; -1947.91,228 ccw(c-1947.91,243.95) C68.1@-1936.63,232.67 ; C68.1@-1925.37,232.67 ccw(c-1914.09,243.95) -1914.09,228 ; C27.2@-1220.94,935 -1168.56,935 v1(-1164.7,938.86) cw(c-1174.02,948.17) -1174.02,935 ; C10.2@-1219.94,1641 v1@-1165.99,1641 ; C19.2@-1217.37,588.43 v1(-1164.7,588.43) ; C9.2@-1216.94,2339 v1(-1161.03,2339) ; C3.2@-1212.94,1974 -1180.85,1974 v1(-1164.7,1990.14) ; C18.2@-1211.94,1287 v1@-1166.99,1287 ; C5.2@-1200.94,2697 -1155.67,2697 v1(-1152.83,2694.17) ; -717.94,2467.21 ccw(c-731.79,2467.21) v1(-722,2477) ccw(c-731.79,2486.79) -717.94,2486.79 ; v1@-657.72,1990.86 C1.2@-717.94,1990.86 ; v1@-657.57,1640.29 C7.2@-717.94,1640.29 ; v1@-657.43,1289.71 C23.2@-717.94,1289.71 ; v1(-657,238) C25.2@-717.94,238 C21.2@-717.94,588.57 ; v1(-657,588.43) -657.14,588.57 C21.2@-717.94,588.57 ; v1(-657,938.86) -657.29,939.14 C24.2@-717.94,939.14 ; v1(-657,2340.57) -657.86,2341.43 C6.2@-717.94,2341.43 ; v1(-657,2691) -658,2692 C32.2@-717.94,2692 C6.2@-717.94,2341.43 ; C21.2@-717.94,588.57 C24.2@-717.94,939.14 ; C24.2@-717.94,939.14 C23.2@-717.94,1289.71 ; C23.2@-717.94,1289.71 C7.2@-717.94,1640.29 ; C7.2@-717.94,1640.29 C1.2@-717.94,1990.86 ; C1.2@-717.94,1990.86 C6.2@-717.94,2341.43
VIN: C31.2 C67.1 J1.A4 J1.A9 J1.B4 J1.B9 P5.2 P6.1 Q5.2 U19.16 | length 5312.4
  Top Layer w10: J1.A9@-1928.58,2628 -1928.58,2699.42 v2(-1900,2728) -1781,2728 -1751.42,2698.42 J1.A4@-1751.42,2628
  Top Layer w20: P5.2@-2250,67 -2251,68 C67.1@-2251,214 -2194,214 -2143,265 -2143,397 -2179.74,433.74 Q5.2@-2221,433.74 ; v2(-1798,1874) U19.16@-1798,1969.91 ; v2(-1758,2326) -1758,2098 -1798,2058 U19.16@-1798,1969.91 ; C31.2@-1713,2052.94 -1713,1992 -1735.09,1969.91 U19.16@-1798,1969.91
  Bottom Layer w20: P6.1@-2522,2578 -2391,2578 -2139,2326 v2(-1758,2326) -1758,2682 -1804,2728 v2(-1900,2728) ; P6.1@-2508.19,2564.19 cw(c-2474.86,2530.86) -2474.86,2578 cw(c-2474.86,2625.14) P6.1@-2508.19,2591.81 ; P5.2@-2250,67 -2250,311 -2429,490 -2429,1254 -2397,1286 -1984,1286 -1870,1400 -1870,1802 v2(-1798,1874)
pads on no net: J1.2 J1.A5 J1.A8 J1.B5 J1.B8 U6.1 U6.2 U6.3 U6.4 U6.5 U6.6 U6.7 U6.8 U6.9 U6.10 U6.11 U6.12 U6.14 U6.18 U6.23 U6.26 U6.41 U6.44 U6.48 U19.7 U19.8 U19.9 U19.10 U19.11 U19.12 U19.13 U19.14 U19.15

## Polygon pours and split planes (outlines as drawn)
GND on Top Layer "Top Layer-No Net" (solid, remove dead copper, pour order 1000): -2807,3086 -2715,2994 -1306,2994 -1306,-113 -1298,-121 -1330,-89 -2816,-89 -2816,2900 -2718,2998
AGND on Top Layer "Top Layer-No Net" (solid, remove dead copper, pour order 1001): 363,700 12,1051 12,3389 -863,3389 -1299,2953 -1278,2932 -1278,2497 -1278,-53 -1209,-122 -1084,-247 133,-247 133,551 329,747 331,749 331,753
GND on Bottom Layer "Top Layer-No Net" (solid, remove dead copper, pour order 1002): -2807,3086 -2715,2994 -1306,2994 -1306,-113 -1298,-121 -1330,-89 -2816,-89 -2816,2900 -2718,2998
AGND on Bottom Layer "Top Layer-No Net" (solid, remove dead copper, pour order 1003): 363,700 3.55,1051 3.55,3389 -892.51,3389 -1339,2953 -1317.49,2932 -1317.49,2497 -1317.49,-53 -1246.83,-122 -1118.83,-247 127.46,-247 127.46,551 328.18,747 330.23,749 330.23,753

## Keep-outs
Keep-Out Layer:
  lines w5: -2591,6 -7,6 -7,2866 -2591,2866 -2591,6

## Silkscreen, mask and mechanical layers (free items; w line width, h text height)
Top Overlay:
  text "B" at -127,2636 h40
  text "5V" at -2452,2561 h40
  text "A" at -124,2538 h40
  text "RXD" at -2450,2468 h40
  text "TXD" at -2459,2400 h40
  text "B" at -128,2276 h40
  text "GND" at -2460,2199 h40
  text "A" at -125,2178 h40
  text "B" at -129,1926 h40
  text "BooT" at -2470,1847 h40 r270
  text "A" at -126,1828 h40
  text "B" at -127,1589 h40
  text "A" at -124,1491 h40
  text "B" at -132,1233 h40
  text "A" at -129,1135 h40
  text "B" at -133,895 h40
  text "A" at -130,797 h40
  text "B" at -130,542 h40
  text "A" at -127,444 h40
  text "B" at -127,229 h40
  text "GND" at -2406,135 h40
  text "5V" at -2275.49,132.88 h40
  text "A" at -124,131 h40
Mechanical 1:
  the board outline again, w5